# Altium PCB PCB1.PcbDoc
Units mm, origin at the board's own origin, x right, y up, seen from the top; angles counter-clockwise.
Board outline 94.16 x 39.95 mm, 2 copper layers (Top Layer, Bottom Layer); 72 components, 37 nets, 217 pads, 328 vias.
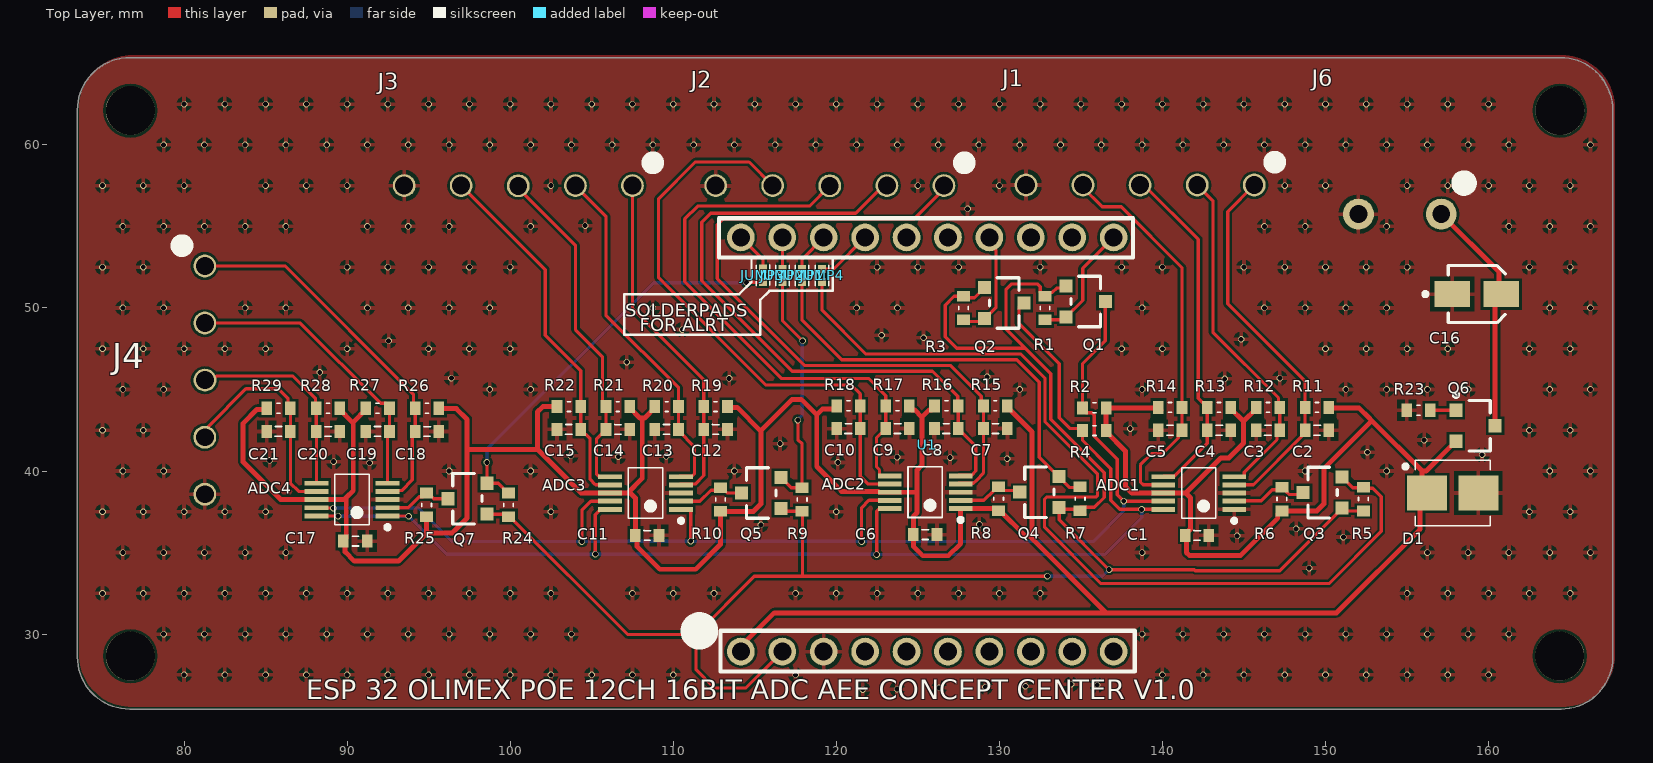
[diagram p0: Top Layer view]
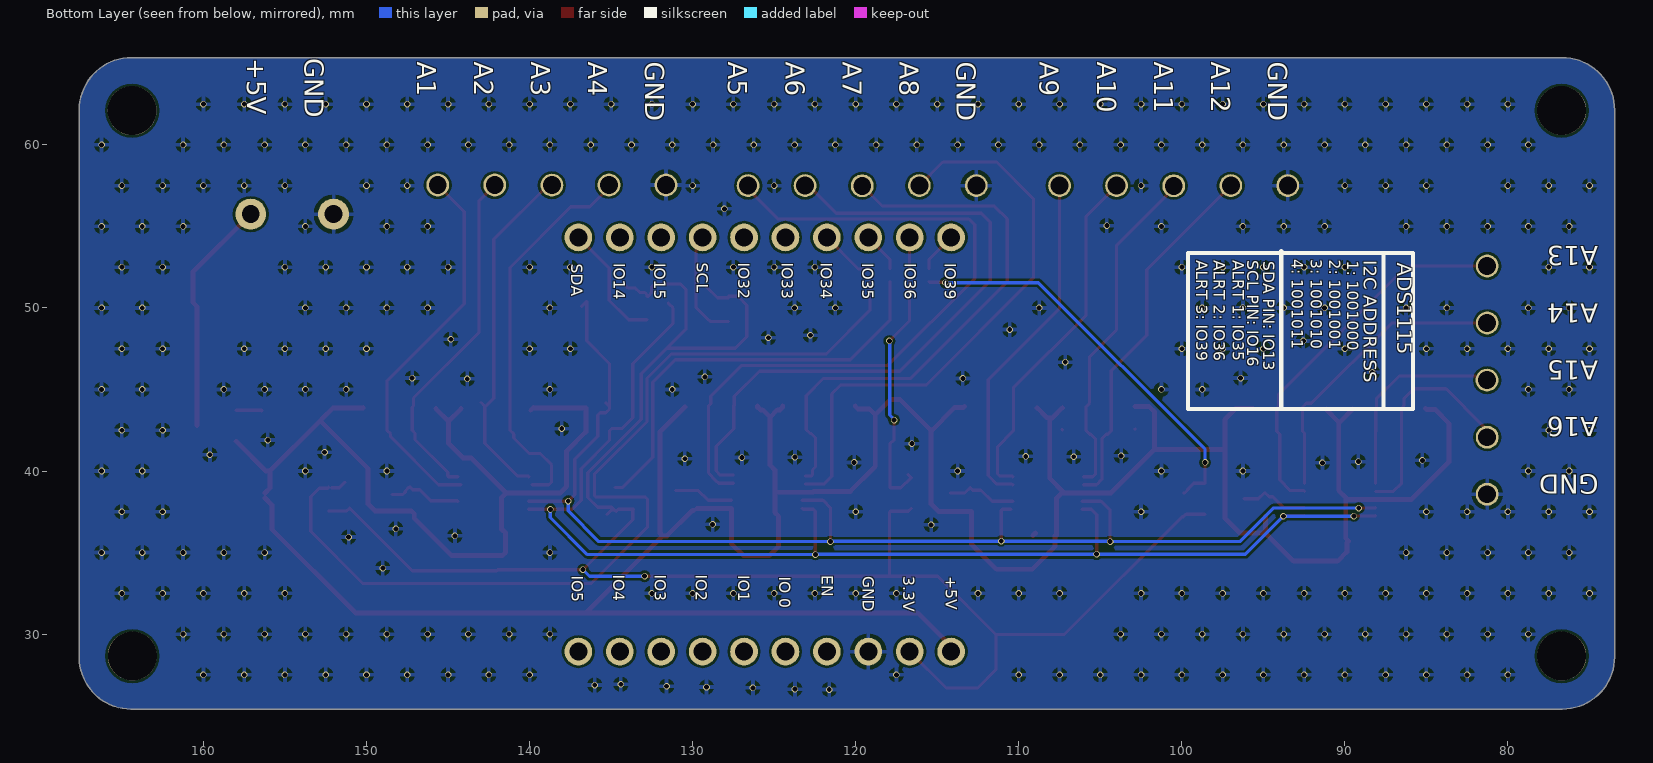
[diagram p1: Bottom Layer view, seen from below]
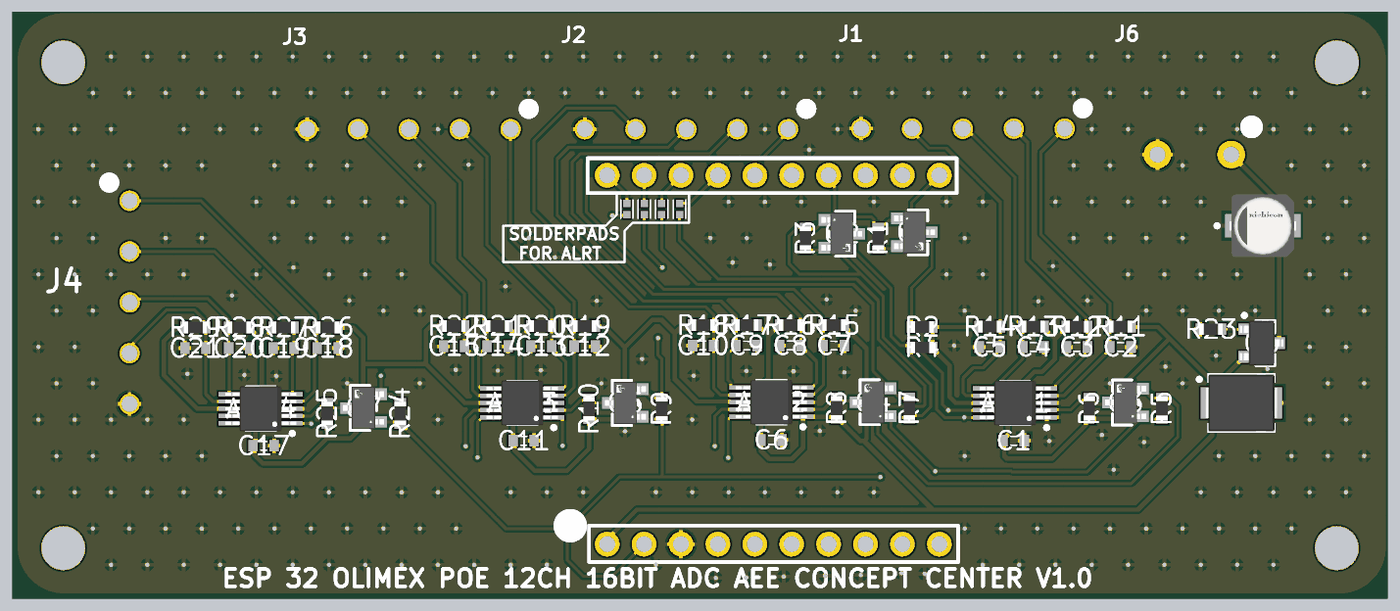
[diagram p2: 3D render of the assembled board from above, using the file's embedded part models]

## Layer stack, top to bottom
Top Solder: solder mask 0.0102, Solder Resist, Dk 3.5
Top Layer: signal copper 0.0356
Dielectric 1: dielectric 0.32, FR-4, Dk 4.8
Bottom Layer: signal copper 0.0356
Bottom Solder: solder mask 0.0102, Solder Resist, Dk 3.5

## Board outline
73.457,28.607 ccw(c76.664,28.607) 76.664,25.4 164.449,25.4 ccw(c164.449,28.565) 167.615,28.565 167.615,62.146 ccw(c164.406,62.146) 164.406,65.354 76.682,65.354 ccw(c76.682,62.129) 73.457,62.129

## Design rules (kind name [scope] priority, off if disabled: settings)
Clearance [All] p1: gap=0.15 ignorepadtopadclearanceinfootprint=FALSE
ComponentClearance [All] p1 off: gap=0.254 collisioncheckmode=3 verticalgap=0.254 showdistances=FALSE
HoleSize [All] p1: absolutevalues=TRUE maxlimit=3.54 minlimit=0.025 maxpercent=80.000 minpercent=20.000
HoleToHoleClearance [All] p1: gap=0.1 allowstackedmicrovias=TRUE
MinimumSolderMaskSliver [All] p1: minsoldermaskwidth=0.01
PolygonConnect [All] p1: connectstyle=Relief reliefconductorwidth=0.254 reliefentries=4 polygonreliefangle="90 Angle" airgapwidth=0.254
RoutingVias [All] p1: holewidth=0.25 width=0.35 viastyle="Through Hole" minholewidth=0.25 minwidth=0.35 maxholewidth=0.25 maxwidth=0.35
SilkToSilkClearance [All] p1: silktosilkclearance=0
SilkToSolderMaskClearance [IsPad] p1: minsilkscreentomaskgap=0.01 clearancetoexposedcopper=TRUE
SolderMaskExpansion SolderMaskExpansion_Via [IsVia] p1: expansion=0.102 istentingtop=TRUE
SolderMaskExpansion [All] p2: expansion=0.102 istentingtop=FALSE
SupplyNets "Schematic Supply Nets_3" [InNet('+5')] p1: voltage=0.000
SupplyNets "Schematic Supply Nets_2" [InNet('+3.3V')] p2: voltage=0.000
SupplyNets "Schematic Supply Nets" [InNet('GND')] p3: voltage=0.000
Width [All] p1: maxlimit=0.35 minlimit=0.2 preferedwidth=0.2 minimp=50.000000 maximp=50.000000 favimp=50.000000
24 further rules are at their usual default settings.

## Classes and differential pairs
component class "Level Switch": Q1 Q2 Q3 Q4 Q5 Q7 R1 R2 R3 R4 R5 R6 R7 R8 R9 R10 R24 R25
component class "Main sheet": ADC1 ADC2 ADC3 ADC4 C1 C2 C3 C4 C5 C6 C7 C8 C9 C10 C11 C12 C13 C14 C15 C16 C17 C18 C19 C20 C21 D1 J1 J2 J3 J4 J5 J6 J7 JUMP1 JUMP2 JUMP3 JUMP4 Q6 R11 R12 R13 R14 R15 R16 R17 R18 R19 R20 R21 R22 R23 R26 R27 R28 R29 T1 T2 T3 T4 T5 T6 T7 T8 T9 T10 T11 T12 U1

## Components (designator, comment, footprint, x,y, rotation, side; value= is the part's Value field where it differs from the comment)
ADC1 "ADS1115" "TSSOP50P490X110-10N ADS1115" 142.225,38.65 r180 top
ADC2 "ADS1115" "TSSOP50P490X110-10N ADS1115" 125.45,38.7 r180 top
ADC3 "ADS1115" "TSSOP50P490X110-10N ADS1115" 108.3,38.65 r180 top
ADC4 "ADS1115" "TSSOP50P490X110-10N ADS1115" 90.3,38.25 r180 top
C1 "0.1uF" "Cap 0603" 142.125,36.05 r180 top
C2 "C0603" "Cap 0603" 149.475,42.5 r180 top
C3 "C0603" "Cap 0603" 146.475,42.5 r0 top
C4 "C0603" "Cap 0603" 143.475,42.5 r180 top
C5 "C0603" "Cap 0603" 140.475,42.5 r0 top
C6 "0.1uF" "Cap 0603" 125.45,36.1 r180 top
C7 "C0603" "Cap 0603" 129.75,42.6 r180 top
C8 "C0603" "Cap 0603" 126.75,42.6 r0 top
C9 "C0603" "Cap 0603" 123.75,42.6 r180 top
C10 "C0603" "Cap 0603" 120.75,42.6 r0 top
C11 "0.1uF" "Cap 0603" 108.4,36.05 r180 top
C12 "10uf" "Cap 0603" 112.6,42.55 r180 top
C13 "C0603" "Cap 0603" 109.6,42.55 r0 top
C14 "C0603" "Cap 0603" 106.6,42.55 r180 top
C15 "C0603" "Cap 0603" 103.6,42.55 r0 top
C16 "UWX1C100MCL2GB" FP-UWX1C100MCL2GB-MFG 159.275,50.85 r0 top
C17 "0.1uF" "Cap 0603" 90.5,35.7 r180 top
C18 "10uf" "Cap 0603" 94.9,42.425 r180 top
C19 "C0603" "Cap 0603" 91.875,42.425 r0 top
C20 "C0603" "Cap 0603" 88.825,42.425 r180 top
C21 "C0603" "Cap 0603" 85.8,42.425 r0 top
D1 "TVS" "DO-214AA P6SMB" 157.8,38.65 r0 top
J1 "kontakt 5p 5.08" "Kontakt 5P 3.5" 145.631,57.539 r180 top
J2 "kontakt 5p 5.08" "Kontakt 5P 3.5" 126.6,57.5 r180 top
J3 "kontakt 5p 5.08" "Kontakt 5P 3.5" 107.497,57.5 r180 top
J4 "kontakt 5p 5.08" "Kontakt 5P 3.5" 81.275,52.572 r270 top
J6 "kontakt 2p 5.08" "Kontakt 2P 5.08" 157.099,55.753 r180 top
JUMP1 "Solder jumper" jumper 117.9,52.389 r270 top
JUMP2 "Solder jumper" jumper 116.7,52.389 r270 top
JUMP3 "Solder jumper" jumper 115.5,52.4 r270 top
JUMP4 "Solder jumper" jumper 119.125,52.389 r270 top
Q1 "AO3400A" FP-SOT23-MFG 135.3,50.4 r0 top
Q2 "AO3400A" FP-SOT23-MFG 130.3,50.3 r0 top
Q3 "AO3400A" FP-SOT23-MFG 149.825,38.675 r180 top
Q4 "AO3400A" FP-SOT23-MFG 132.45,38.7 r180 top
Q5 "AO3400A" FP-SOT23-MFG 115.4,38.65 r180 top
Q6 "AO3401A" AO-SOT-23-3L_V 159.2,42.775 r0 top
Q7 "AO3400A" FP-SOT23-MFG 97.375,38.3 r180 top
R1 "10k" "Res 0603" 132.8,50 r90 top
R2 "10k" "Res 0603" 135.825,43.875 r0 top
R3 "10k" "Res 0603" 127.8,50 r90 top
R4 "10k" "Res 0603" 135.825,42.475 r0 top
R5 "10k" "Res 0603" 152.325,38.275 r270 top
R6 "10k" "Res 0603" 147.325,38.275 r270 top
R7 "10k" "Res 0603" 134.95,38.3 r270 top
R8 "10k" "Res 0603" 129.95,38.3 r270 top
R9 "10k" "Res 0603" 117.9,38.25 r270 top
R10 "10k" "Res 0603" 112.9,38.25 r270 top
R11 "9.1k ATS" "Res 0603" 149.475,43.9 r0 top
R12 "5.1k MTS" "Res 0603" 146.475,43.9 r180 top
R13 "3.3k HEX" "Res 0603" 143.475,43.9 r0 top
R14 "3.3k EVAP" "Res 0603" 140.475,43.9 r180 top
R15 "5.1k" "Res 0603" 129.75,44 r0 top
R16 "DTS_2" "Res 0603" 126.75,44 r180 top
R17 "DTS_3" "Res 0603" 123.75,44 r0 top
R18 "DTS_4" "Res 0603" 120.75,44 r180 top
R19 "DTS_5" "Res 0603" 112.6,43.95 r0 top
R20 "DTS_6" "Res 0603" 109.6,43.95 r180 top
R21 "DTS_7" "Res 0603" 106.6,43.95 r0 top
R22 "DTS_8" "Res 0603" 103.6,43.95 r180 top
R23 "100k" "Res 0603" 155.7,43.725 r0 top
R24 "10k" "Res 0603" 99.9,37.925 r270 top
R25 "10k" "Res 0603" 94.875,37.925 r270 top
R26 "DTS_5" "Res 0603" 94.9,43.85 r0 top
R27 "DTS_6" "Res 0603" 91.875,43.85 r180 top
R28 "DTS_7" "Res 0603" 88.825,43.85 r0 top
R29 "DTS_8" "Res 0603" 85.8,43.85 r180 top
U1 "ESP32 olimex PINOUT" "ESP32 OLIMEX POE" 114.148,28.925 r90 top locked

## Footprints (in the part's own frame and the unit in brackets; to place one, negate y for a bottom-side part, rotate by r counter-clockwise, add the part's x,y. Pads: shape width x height; smd on the part's side, far side on the other; paste and mask are expansions set on the pad)
AO-SOT-23-3L_V [mm] "SOT23, 3-Leads, Body 3.1x1.8mm, Pitch 0.95mm"
  rect 0.8x0.8 smd: 1(-1.2,0.95) 2(-1.2,-0.95) 3(1.2,0)
  silkscreen extent -1.32,-1.55 0.9,2.02, body extent -1.5,-1.55 1.5,1.55, height 1.25
"Cap 0603" [mm]
  rect 0.65x0.8 smd: 1(-0.725,0) 2(0.725,0)
  silkscreen extent -0.22,-0.3 0.19,0.3, body extent -0.8,-0.4 0.8,0.4, height 0.45
"DO-214AA P6SMB" [mm] "Molded Diode, 2-Leads, Body 4,31x3,62mm, IPC Medium Density"
  rect 2.45x2.15 smd: 1(-1.575,0) 2(1.575,0)
  silkscreen extent -3.02,-2 2.3,2, body extent -2.5,-1.97 2.5,1.97, height 2.65
"ESP32 OLIMEX POE" [mm]
  round 1.7 hole 1.1: 1(0,0) 2(0,-2.54) 3(0,-5.08) 4(0,-7.62) 5(0,-10.16) 6(0,-12.7) 7(0,-15.24) 8(0,-17.78) 9(0,-20.32) 10(0,-22.86) 11(25.4,-22.86) 12(25.4,-20.32) 13(25.4,-17.78) 14(25.4,-15.24) 15(25.4,-12.7) 16(25.4,-10.16) 17(25.4,-7.62) 18(25.4,-5.08) 19(25.4,-2.54) 20(25.4,0)
  silkscreen extent 0.87,2.14 1.67,2.94
FP-SOT23-MFG [mm]
  rect 0.8x0.8 smd paste+0 mask+0: 1(-1.2,0.95) 2(-1.2,-0.95) 3(1.2,0)
  silkscreen extent -0.9,-1.55 0.9,1.55, body extent -1.7,-1.78 1.7,1.78, height 0.25
FP-UWX1C100MCL2GB-MFG [mm]
  rect 2.2x1.6 smd paste+0 mask+0: 1(-1.5,0) 2(1.5,0)
  silkscreen extent -3.27,-1.75 1.75,1.75, body extent -2.85,-2 2.85,2, height 0.25
jumper [mm]
  rect 0.5x0.5 smd: 1(0,0) 2(0.789,0)
  silkscreen extent -0.23,-0.42 1.03,0.42
"Kontakt 2P 5.08" [mm]
  round 1.9 hole 1.1: 1(0,0) 2(5.08,0)
  silkscreen extent -1.68,-2.19 -1.11,-1.62, body extent -3.43,-9.65 8.51,2.03, height 8.5
"Kontakt 5P 3.5" [mm]
  round 1.4 hole 1.1: 1(0,0) 2(3.497,0) 3(7.001,0.009) 4(10.501,-0.002) 5(13.996,-0.002)
  silkscreen extent -1.45,-1.6 -1.06,-1.21, body extent -2.3,-7.71 16.29,1.39, height 7
"Res 0603" [mm]
  rect 0.65x0.8 smd: 1(-0.725,0) 2(0.725,0)
  silkscreen extent -0.1,-0.3 0.1,0.3, body extent -0.8,-0.4 0.8,0.4, height 0.45
"TSSOP50P490X110-10N ADS1115" [mm] "TSSOP, 10-Leads, Body 3,00x3,00mm, Pitch 0,50mm, IPC Medium Density"
  rect 1.45x0.3 smd: 1(-2.175,1) 2(-2.175,0.5) 3(-2.175,0) 4(-2.175,-0.5) 5(-2.175,-1) 6(2.175,-1) 7(2.175,-0.5) 8(2.175,0) 9(2.175,0.5) 10(2.175,1)
  silkscreen extent -2.3,-1.55 1.05,1.82, body extent -2.45,-1.55 2.45,1.55, height 1.1

## Part data
ADC1 ADC2 ADC3 ADC4: library part ADS1113, "4-Channel Single ADC Delta-Sigma 860sps 16-bit Serial 10-Pin VSSOP T/R", Case/Package=VSSOP, Manufacturer="Texas Instruments", Manufacturer Part Number=ADS1115IDGSR, Max Operating Temperature=125°C, Max Supply Voltage=5.5V, Min Operating Temperature=-40°C, Min Supply Voltage=2V, Nominal Supply Current=150uA, Package Quantity=2500, Power Dissipation=900uW, Supplier Part Number=595-ADS1115IDGSR, Category="Analog to Digital Converters (ADCs)", ComponentLink1Description=https://datasheet.ciiva.com/4031/47725463s8438921n7713-4031028.pdf?src-supplier=Arrow+Electronics, ComponentLink1URL=https://datasheet.ciiva.com/4031/47725463s8438921n7713-4031028.pdf?src-supplier=Arrow+Electronics, Contact Plating=Gold, Conversion Rate=0.86KS/s, Height=1.07mm, Integral Nonlinearity (INL)=1LSB, Interface=I2C, Lead Free="Lead Free", Length=3mm, Max Supply Voltage (DC)=5.5V, Min Supply Voltage (DC)=2V, Number of A/D Converters=1, Number of Bits=16, Number of Channels=2, Number of Converters=1, Number of Inputs=4, Packaging="Tape and Reel", Pins=10, Polarity=Bipolar, Pricing="1=5,34, 10=3,91, 50=3,91, 100=3,3, 1000=2,64, 10000=2,49 (USD)", Reach SVHC Compliant=No, Resolution=16b, RoHS=Yes, RoHS Compliant=Yes, Sampling Rate=860S/s, Series=-, Stock=9640, Supplier=Mouser, Supply Type=Single, Thickness=1.02mm, Width=3mm
C1 C6 C11 C17: library part C0603, "C14663"
C2 C3 C4 C5 C7 C8 C9 C10 C13 C14 C15 C19 C20 C21: "C96446"
C12 C18: library part C0603, "C96446"
C16: library part CMP-00267-00203106-1, "UWX1C100MCL2GB WX Series 10 uF 16 V 85°C Ø3 x 5.4 mm SMT Chip Aluminum Electrolytic Cap", Capacitance=10µF, Case/Package=SMD/SMT, Dielectric Material=Aluminium, Leakage Current=3µA, Max Operating Temperature=85°C, Min Operating Temperature=-40°C, Ripple Current=18mA, Tolerance=20%, Voltage=16V, Diameter=3mm, Dissipation Factor=19%, Features="General Purpose", Height=5.4mm, Height - Seated (Max)=2.9972mm, Lead Diameter=800µm, Lead Free="Lead Free", Lead Pitch=800µm, Length=5.4mm, Life (Hours)=2000hours, Mount="Surface Mount", NexarPartId=203106, Number of Pins=2, Packaging="Cut Tape", Radiation Hardening=No, REACH SVHC="No SVHC", Ripple Current (AC)=18mA, RoHS=Compliant, Schedule B="8532220020, 8532220020", Termination=SMD/SMT, Voltage Rating=16V, Voltage Rating (AC)=16V, Voltage Rating (DC)=16V, Width=3.3mm
D1: "jlc: C78395", Manufacturer=Brightking, Manufacturer Part Number=P6SMB6.8CA/TR13
Q1 Q2 Q3 Q4 Q5 Q7: library part CMP-83955-000006-1, "MOSFET N-CH 30V 5.7A SOT23", Case/Package=SOT-23, Continuous Drain Current (ID)=5.7A, Drain to Source Voltage (Vdss)=30V, Gate to Source Voltage (Vgs)=12V, Input Capacitance=630pF, Max Operating Temperature=150°C, Max Power Dissipation=1.4W, Min Operating Temperature=-55°C, Lead Free="Lead Free", Mount="Surface Mount", Number of Elements=1, Number of Pins=3, Packaging="Tape and Reel", Power Dissipation=1.4W, Radiation Hardening=No, Rds On Max=26.5mR
Q6: library part CMP-2000-05778-1, "P-Channel MOSFET, 30 V, 4 A, -55 to 150 degC, 3-Pin SOT-23-3L, RoHS, Tape and Reel", Continuous Drain Current=4A, Drain-Source On-Volt=30V, Frequency (Max)=NotRequiredMHz, Gate-Source Voltage (Max)=?12V, Manufacturer="Alpha and Omega", Operating Temp Range=-55Cto150C, Operating Temperature Classification=Military, Output Power (Max)=NotRequiredW, Package Description="3-Pin Small Outline Transistor, Body 2.95 x 1.6 mm, Pitch 0.95 mm", Package Reference=SOT-23-3L, Package Type=SOT-23, Power Dissipation=1.4W, Power Gain=NotRequireddB, Channel Mode=Enhancement, Datasheet URL=http://www.aosmd.com/res/data_sheets/AO3401A.pdf, Datasheet Version="Rev. 3, 03/2011", Drain Current (Max)=4A, Drain Efficiency=NotRequired%, Drain-Source On-Res=0.044ohm, Manufacturer URL=http://www.aosmd.com/, Mounting=SurfaceMount, Mounting Technology=SurfaceMount, Noise Figure=NotRequireddB, Number of  Elements=1, Package URL=http://www.aosmd.com/res/packaging_information/SOT-23-3L.pdf, Pin Count=3, Polarity=P, Rad Hardened=No, Type=PowerMOSFET
R1 R2 R3 R4 R5 R6 R7 R8 R9 R10 R24 R25: library part R0603, "C25804"
R11: library part R0603, "ATS / Thermistor: 270-333k / R11: 9.1k"
R12: library part R0603, "MTS / Thermistor: 103k / R12: 5.1k"
R13: library part R0603, "HEX / Thermistor: 96k / R13: 3.3k"
R14: library part R0603, "EVAP / Thermistor: 96k / R14: 3.3k"
R15: library part R0603, "DTS_1 / Thermistor: 101k / R15: 5.1k"
R16: library part R0603, "DTS_2 / Thermistor: 101k / R16: 5.1k"
R17: library part R0603, "DTS_3 / Thermistor: 101k / R17: 5.1k"
R18: library part R0603, "DTS_4 / Thermistor: 101k / R18: 5.1k"
R19 R26: library part R0603, "DTS_5 / Thermistor: 101k / R19: 5.1k"
R20 R27: library part R0603, "DTS_6 / Thermistor: 101k / R20: 5.1k"
R21 R28: library part R0603, "DTS_7 / Thermistor: 101k / R21: 5.1k"
R22 R29: library part R0603, "DTS_8 / Thermistor: 101k / R22: 5.1k"
R23: library part R0603

## Free pads (board coordinates)
  round 3 hole 3: 6(76.708,28.651) 6(76.708,62.103) 6(164.363,28.651) 6(164.375,62.1)

## Via types
v1: diameter 0.4, hole 0.3, Top Layer to Bottom Layer, tented both sides, 328 vias

## Nets (pads, with @x,y where several pads share a name; then routed paths per layer and width w, separated by ;. In a path a pad name is that pad's centre, name@x,y a point inside that pad or via, vN(x,y) a via of type N, cw(c..) or ccw(c..) an arc to the next point about the centre after c; other vN are vias at no path point)
+3.3V: Q1.1 Q2.1 Q3.1 Q4.1 Q5.1 Q7.1 R1.2 R3.2 R5.2 R7.2 R9.2 R24.2 U1.2 | length 112.8
  Top Layer w0.2: Q7.1 99.75,37.35 R24.2 99.975,37.2 107.2,29.975 111.4,29.975 ; Q5.1 116.775,37.525 R9.2 ; U1.2 114.463,26.7 112.5,26.7 111.4,27.8 111.4,29.975 ; R9.2@117.925,37.493 117.925,33.55 ; R3.2@127.8,50.625 128.475,50.625 Q2.1 ; R3.2 127.792,50.717 127.217,50.717 126.675,50.175 126.675,48.225 127.375,47.525 131.6,47.525 ; R1.2 R1.2@132.725,50.725 ; v1@132.954,33.55 v1(132.95,33.55) 117.925,33.55 ; Q1.1 133.967,51.217 133.517,51.217 133.25,50.95 132.95,50.95 R1.2@132.725,50.725 ; R7.2@134.688,37.537 134.575,37.65 133.65,37.65 133.675,37.625 133.675,37 v1(136.725,33.95) 141.948,33.95 142.008,33.891 147.191,33.891 Q3.1 151.2,37.55 R5.2 ; R7.2@134.825,37.575 134.75,37.575 134.95,37.775 135.825,37.775 136.425,38.375 136.425,39.9 133.15,43.175 133.15,45.975 131.6,47.525 ; R7.2 135.025,37.575 R7.2@135.25,37.35 ; 111.4,29.975 114.975,33.55 117.925,33.55 ; 131.6,47.525 130.4,48.725 130.4,51.125 130.75,51.475 132.325,51.475 132.5,51.3 132.5,50.95 R1.2@132.725,50.725
  Bottom Layer w0.2: v1(132.95,33.55) 136.325,33.55 v1(136.725,33.95)
+5: ADC1.8 ADC2.1 ADC2.8 ADC3.8 ADC4.8 C1.2 C6.2 C11.2 C17.2 D1.1 Q6.2 R2.2 R4.2 R6.2 R8.2 R10.2 R11.2 R12.2 R13.2 R14.2 R15.2 R16.2 R17.2 R18.2 R19.2 R20.2 R21.2 R22.2 R25.2 R26.2 R27.2 R28.2 R29.2 U1.1 | length 236.1
  Top Layer w0.2: R28.2@89.55,43.775 R28.2 ; 90.325,43 90.375,43 ; R27.2@91.15,43.775 R27.2 ; R21.2@107.325,43.875 R21.2 ; R20.2@108.875,43.875 R20.2 ; R15.2@130.475,43.925 R15.2 ; R14.2@139.725,43.875 R14.2 ; R13.2@144.2,43.825 R13.2 ; R12.2@145.75,43.825 R12.2
  Top Layer w0.3: R29.2 85.001,43.776 84.476,43.776 83.625,42.925 83.625,40.55 85.925,38.25 ADC4.8 89.825,38.25 89.95,38.375 ; R28.2@89.55,43.775 90.325,43 ; R27.2@91.15,43.775 90.375,43 90.375,38.8 89.95,38.375 ; R25.2 94.875,36.2 ; R26.2 95.65,43.825 96.7,43.825 97.35,43.175 97.35,41.275 ; R22.2 102,43.95 101.675,43.625 101.675,41.325 ; R21.2@107.325,43.875 107.95,43.25 108.1,43.25 ; C11.2 107.675,38.347 107.372,38.65 107.2,38.65 ; C11.2@107.7,36.129 107.768,36.061 107.768,35.382 109.175,33.975 111.375,33.975 112.9,35.5 R10.2 114.925,37.525 115.375,37.975 115.375,42.45 ; R20.2@108.875,43.875 108.25,43.25 108.1,43.25 ; R19.2 113.374,43.901 113.924,43.901 115.375,42.45 ; U1.1 114.148,29.248 116.2,31.3 136.525,31.3 ; R18.2 120.025,43.969 119.85,43.794 119.144,43.794 118.8,43.45 ; R17.2 124.475,43.925 124.65,43.75 124.8,43.75 125.25,43.3 ; R16.2 126.025,43.925 125.85,43.75 125.7,43.75 125.25,43.3 ; ADC2.1@128.049,37.7 ADC2.1 ; R8.2@129.75,37.7 ADC2.1 ; R8.2 130.025,37.575 131.576,36.024 131.824,36.024 ; R15.2@130.475,43.925 132,42.4 132,36.2 131.824,36.024 ; R14.2@139.725,43.875 R2.2 R4.2 136.55,42.4 137.725,41.225 137.725,39.05 138.125,38.65 ADC1.8 141.425,38.65 ; R14.2 R14.2@139.925,43.725 ; R13.2@144.2,43.825 144.975,43.05 ; R12.2@145.75,43.825 144.975,43.05 ; R11.2 150.225,43.875 152.05,43.875 152.675,43.25 152.837,43.087 ; D1.1@156.225,38.342 155.801,37.918 155.801,36.426 150.675,31.3 136.525,31.3 ; D1.1 155.926,38.949 155.926,39.999 ; Q6.2 156.174,39.999 155.926,39.999 ; 89.95,38.375 89.95,35.875 C17.2 89.881,35.594 89.881,35.044 90.45,34.475 93.15,34.475 94.875,36.2 ; 94.875,36.2 96.45,36.2 97.35,37.1 97.35,41.275 ; 97.35,41.275 97.4,41.325 101.675,41.325 ; 101.675,41.325 104.35,38.65 104.675,38.65 ADC3.8 107.2,38.65 ; 107.2,38.65 108.1,39.55 108.1,43.25 ; 115.375,42.45 115.375,42.475 117.275,44.375 117.875,44.375 118.8,43.45 ; 118.8,43.45 118.8,40.275 120.325,38.75 122.562,38.75 122.612,38.7 ADC2.8 123.938,38.7 124.95,38.7 ; 124.95,38.7 124.95,40.05 125.25,40.35 125.25,43.3 ; 124.95,38.7 124.95,37.45 124.725,37.225 C6.2 124.725,35.375 125.3,34.8 126.875,34.8 127.625,35.55 ADC2.1 ; 131.824,36.024 136.525,31.324 136.525,31.3 ; 141.425,38.65 141.721,38.354 141.721,36.446 141.473,36.198 141.473,35.001 141.649,34.825 144.8,34.825 147.075,37.1 147.075,37.375 147.25,37.55 R6.2 149.475,37.55 149.9,37.975 149.9,40.15 152.837,43.087 ; 141.425,38.65 143.575,40.8 144.075,40.8 144.975,41.7 144.975,43.05 ; 152.837,43.087 155.926,39.999
ALRT1_IN: JUMP4.2 Q3.2 R5.1 | length 58.6
  Top Layer w0.2: JUMP4.2 119.125,49.85 121.8,47.175 131.325,47.175 132.8,45.7 132.8,43.025 136.025,39.8 136.025,38.517 135.908,38.4 132.892,38.4 132.775,38.283 132.775,36.55 136.225,33.1 150.233,33.1 153.425,36.292 153.425,38.425 152.908,38.942 152.383,38.942 R5.1 ; Q3.2@151.316,39.325 151.325,39.325 151.325,39.316 151.666,38.975 R5.1@152.125,38.975
ALRT1_OUT: ADC1.2 Q3.3 R6.1 | length 4.6
  Top Layer w0.2: ADC1.2 144.425,38.175 146.065,38.175 146.742,38.853 147.178,38.853 R6.1 147.4,39 147.625,38.775 147.625,38.7 147.767,38.558 Q3.3@148.442,38.558
ALRT2_IN: JUMP1.2 Q4.2 R7.1 | length 26.2
  Top Layer w0.2: JUMP1.2 117.9,49.25 120.325,46.825 131.075,46.825 132.45,45.45 132.45,40.85 Q4.2 134.315,38.985 R7.1@134.765,38.985
ALRT2_OUT: ADC2.2 Q4.3 R8.1 | length 3.7
  Top Layer w0.2: ADC2.2 129.05,38.2 129.65,38.8 Q4.3@131.05,38.8
ALRT3_IN: JUMP2.2 Q5.2 R9.1 | length 15.2
  Top Layer w0.2: JUMP2.2 116.7,49.21 v1(117.936,47.974) ; Q5.2@116.775,39.775 Q5.2 117.225,38.975 R9.1 117.9,41.665 117.645,41.92 v1(117.645,43.122)
  Bottom Layer w0.2: v1(117.645,43.122) 117.645,43.162 117.918,43.435 117.918,47.956 v1(117.936,47.974)
ALRT3_OUT: ADC3.2 Q5.3 R10.1 | length 4.3
  Top Layer w0.2: ADC3.2@110.375,38.15 111.64,38.15 112.317,38.828 112.828,38.828 112.975,38.975 113.3,38.65 Q5.3
ALRT4_IN: JUMP3.2 Q7.2 R24.1 | length 24.9
  Top Layer w0.2: v1@98.6,40.55 v1(98.575,40.525) Q7.2 99.275,39.25 99.6,38.925 99.6,38.875 99.825,38.65 R24.1 ; v1(114.5,51.55) 114.529,51.579 115.468,51.579 JUMP3.2
  Bottom Layer w0.2: v1(98.575,40.525) 98.575,41.325 108.8,51.55 v1(114.5,51.55)
ALRT4_OUT: ADC4.2 Q7.3 R25.1 | length 4.2
  Top Layer w0.2: ADC4.2 93.75,37.75 94.425,38.425 94.65,38.425 R25.1 94.95,38.65 95.3,38.3 Q7.3
GND: ADC1.1 ADC1.3 ADC2.3 ADC3.3 ADC4.3 C1.1 C2.1 C3.1 C4.1 C5.1 C6.1 C7.1 C8.1 C9.1 C10.1 C11.1 C12.1 C13.1 C14.1 C15.1 C16.1 C17.1 C18.1 C19.1 C20.1 C21.1 D1.2 J1.5 J2.5 J3.5 J4.5 J6.2 R23.1 U1.3 | length 0.3
  Top Layer w0.2: C15.1@102.854,42.571 C15.1 ; C14.1 C14.1@107.339,42.536 ; U1.3@119.214,28.939 U1.3 ; J6.2 J6.2@152.034,55.768
  Top Layer w0.3: C11.1@108.975,36.2 C11.1
  other v1: 121.625,26.6 123.725,26.625 126.3,26.7 129.15,26.75 131.6,26.8 136,26.875 134.4,26.925 80,27.5 82.5,27.5 85,27.5 87.5,27.5 90,27.5 92.5,27.5 95,27.5 97.5,27.5 100,27.5 102.5,27.5 105,27.5 107.5,27.5 110,27.5 117.5,27.5 140,27.5 142.5,27.5 145,27.5 147.5,27.5 150,27.5 152.5,27.5 155,27.5 157.5,27.5 160,27.5 78.75,30 81.25,30 83.75,30 86.25,30 88.75,30 91.25,30 93.75,30 96.25,30 98.75,30 101.25,30 103.75,30 138.75,30 141.25,30 143.75,30 146.25,30 148.75,30 151.25,30 153.75,30 156.25,30 158.75,30 161.25,30 75,32.5 77.5,32.5 80,32.5 82.5,32.5 85,32.5 87.5,32.5 90,32.5 92.5,32.5 95,32.5 97.5,32.5 100,32.5 102.5,32.5 107.5,32.5 110,32.5 112.5,32.5 117.5,32.5 120,32.5 122.5,32.5 125,32.5 127.5,32.5 130,32.5 132.5,32.5 155,32.5 157.5,32.5 160,32.5 162.5,32.5 165,32.5 149,34.05 76.25,35 78.75,35 81.25,35 83.75,35 86.25,35 138.75,35 156.25,35 158.75,35 161.25,35 163.75,35 166.25,35 151.1,35.95 144.575,36.025 148.2,36.45 115.375,36.7 128.775,36.725 75,37.5 77.5,37.5 80,37.5 82.5,37.5 85,37.5 102.5,37.5 120,37.5 162.5,37.5 165,37.5 76.25,40 78.75,40 96.25,40 101.25,40 113.75,40 148.75,40 153.75,40 163.75,40 166.25,40 91.375,40.5 120.1,40.525 89.175,40.575 85.25,40.65 130.475,40.75 126.975,40.825 123.725,40.85 106.625,40.875 109.575,40.9 103.725,40.925 159.6,41 152.575,41.15 116.55,41.675 156.05,41.9 75,42.5 77.5,42.5 162.5,42.5 165,42.5 138.025,42.6 76.25,45 78.75,45 98.75,45 101.25,45 131.25,45 138.75,45 151.25,45 153.75,45 156.25,45 158.75,45 163.75,45 166.25,45 143.825,45.65 113.425,45.675 96.4,45.7 147.202,45.702 129.25,45.775 88.325,46.05 107.15,46.675 75,47.5 77.5,47.5 80,47.5 82.5,47.5 85,47.5 90,47.5 95,47.5 97.5,47.5 100,47.5 137.5,47.5 140,47.5 150,47.5 152.5,47.5 155,47.5 157.5,47.5 162.5,47.5 165,47.5 92.55,47.975 144.827,48.077 125.35,48.175 122.775,48.325 110.55,48.675 76.25,50 78.75,50 83.75,50 86.25,50 91.25,50 93.75,50 96.25,50 98.75,50 108.75,50 121.25,50 123.75,50 138.75,50 146.25,50 148.75,50 151.25,50 153.75,50 163.75,50 166.25,50 75,52.5 77.5,52.5 90,52.5 92.5,52.5 95,52.5 97.5,52.5 100,52.5 122.5,52.5 125,52.5 127.5,52.5 132.5,52.5 137.5,52.5 140,52.5 145,52.5 147.5,52.5 150,52.5 152.5,52.5 155,52.5 162.5,52.5 165,52.5 76.25,55 78.75,55 81.25,55 83.75,55 86.25,55 91.25,55 93.75,55 96.25,55 101.25,55 146.25,55 148.75,55 153.75,55 161.25,55 163.75,55 166.25,55 104.6,55.05 128.05,56.075 75,57.5 77.5,57.5 80,57.5 85,57.5 87.5,57.5 90,57.5 102.5,57.5 125,57.5 130,57.5 147.5,57.5 150,57.5 155,57.5 157.5,57.5 160,57.5 162.5,57.5 165,57.5 78.75,60 81.25,60 83.75,60 86.25,60 88.75,60 91.25,60 93.75,60 96.25,60 98.75,60 101.25,60 103.75,60 106.25,60 108.75,60 111.25,60 113.75,60 116.25,60 118.75,60 121.25,60 123.75,60 126.25,60 128.75,60 131.25,60 133.75,60 136.25,60 138.75,60 141.25,60 143.75,60 146.25,60 148.75,60 151.25,60 153.75,60 156.25,60 158.75,60 161.25,60 166.25,60 80,62.5 82.5,62.5 85,62.5 87.5,62.5 90,62.5 92.5,62.5 95,62.5 97.5,62.5 100,62.5 102.5,62.5 105,62.5 107.5,62.5 110,62.5 112.5,62.5 115,62.5 117.5,62.5 120,62.5 122.5,62.5 125,62.5 127.5,62.5 130,62.5 132.5,62.5 135,62.5 137.5,62.5 140,62.5 142.5,62.5 145,62.5 147.5,62.5 150,62.5 152.5,62.5 155,62.5 157.5,62.5 160,62.5
NetADC1_4: ADC1.4 C2.2 J1.1 R11.1 | length 23.7
  Top Layer w0.2: ADC1.4@144.2,39.15 145.585,39.15 148.525,42.09 148.525,42.275 C2.2 R11.1 148.75,45.5 144,50.25 144,55.908 J1.1
NetADC1_5: ADC1.5 C3.2 J1.2 R12.1 | length 21.5
  Top Layer w0.2: J1.2 143.1,56.573 143.1,48.5 147.117,44.483 147.117,43.983 R12.1 C3.2 147.025,42.325 147.025,41.925 145.025,39.925 145.025,39.7 144.975,39.65 ADC1.5
NetADC1_6: ADC1.6 C4.2 J1.3 R13.1 | length 21.6
  Top Layer w0.2: J1.3 138.87,57.53 142.2,54.2 142.2,44.45 R13.1 ; ADC1.6 140.1,39.7 140.75,39.7 142.75,41.7 C4.2 R13.1 ; R13.1@142.975,44.2 142.75,43.975 R13.1
NetADC1_7: ADC1.7 C5.2 J1.4 R14.1 | length 24.1
  Top Layer w0.2: J1.4@135.053,57.447 136.3,56.2 137.475,56.2 141.2,52.475 R14.1 C5.2 140.975,42.275 140.975,42.025 140.025,41.075 139.35,41.075 138.65,40.375 138.65,39.325 138.825,39.15 ADC1.7@139.85,39.15
NetADC2_4: ADC2.4 C7.2 J2.1 R15.1 | length 44
  Top Layer w0.2: J2.1@126.701,57.401 124.75,55.45 113.05,55.45 112.7,55.1 112.7,51.8 118.025,46.475 127,46.475 128.892,44.583 128.892,44.133 R15.1 C7.2 129.025,39.871 128.6,39.446 128.404,39.25 ADC2.4@127.491,39.25
NetADC2_5: ADC2.5 C8.2 J2.2 R16.1 | length 40.5
  Top Layer w0.2: J2.2@122.878,57.494 121.185,55.8 112.3,55.8 111.75,55.25 111.75,51.675 117.3,46.125 125.9,46.125 127.442,44.583 127.442,44.033 R16.1 C8.2 128.55,41.525 128.55,40 128.3,39.75 ADC2.5@127.491,39.75
NetADC2_6: ADC2.6 C9.2 J2.3 R17.1 | length 34.5
  Top Layer w0.2: J2.3 118.358,56.25 111.5,56.25 110.707,55.457 110.707,51.593 116.625,45.675 121.975,45.675 123.025,44.625 R17.1 C9.2 123.025,42.525 122.8,42.3 122.725,42.3 122.466,42.041 122.466,40.25 122.65,40.066 122.65,39.75 122.7,39.7 ADC2.6@123.091,39.7
NetADC2_7: ADC2.7 C10.2 J2.4 R18.1 | length 35.6
  Top Layer w0.2: J2.4 114.651,58.95 111.35,58.95 109.1,56.7 109.1,51.85 115.675,45.275 120.925,45.275 121.475,44.725 R18.1 C10.2 121.475,39.675 121.95,39.2 ADC2.7@123.091,39.2
NetADC3_4: ADC3.4 C12.2 J3.1 R19.1 | length 21.3
  Top Layer w0.2: J3.1 107.497,49.978 111.875,45.6 R19.1 C12.2 111.875,39.725 111.35,39.2 110.425,39.2 ADC3.4@110.375,39.15
NetADC3_5: ADC3.5 C13.2 J3.2 R20.1 | length 21.7
  Top Layer w0.2: J3.2 105.875,55.625 105.875,49.55 110.325,45.1 R20.1 C13.2 110.325,42.475 111.3,41.5 111.3,39.817 111.183,39.7 110.425,39.7 ADC3.5@110.375,39.65
NetADC3_6: ADC3.6 C14.2 J3.3 R21.1 | length 21.7
  Top Layer w0.2: J3.3@100.104,57.883 100.104,57.604 99.991,57.491 J3.3@100.21,57.272 ; J3.3 100.496,57.35 104,53.846 104,48.675 105.658,47.017 105.658,44.167 R21.1 C14.2 105.875,42.475 105.65,42.25 105.575,42.25 105.3,41.975 105.3,39.8 105.45,39.65 ADC3.6@106.025,39.65
NetADC3_7: ADC3.7 C15.2 J3.4 R22.1 | length 22.6
  Top Layer w0.2: J3.4 102.15,52.348 102.15,48.325 104.325,46.15 R22.1 C15.2 104.325,42.475 104.55,42.25 104.625,42.25 104.9,41.975 104.9,39.496 105.196,39.2 105.2,39.2 105.238,39.162 106.013,39.162 ADC3.7@106.025,39.15
NetADC4_4: ADC4.4 C18.2 J4.1 R26.1 | length 23.2
  Top Layer w0.2: J4.1 86.203,52.572 94.067,44.708 94.067,43.958 R26.1 C18.2 94,42.25 94,39.45 93.35,38.8 92.525,38.8 ADC4.4
NetADC4_5: ADC4.5 C19.2 J4.2 R27.1 | length 18.2
  Top Layer w0.2: J4.2 87.125,49.075 92.05,44.15 92.375,44.15 92.6,43.925 C19.2 92.475,42.3 ADC4.5
NetADC4_6: ADC4.6 C20.2 J4.3 R28.1 | length 12.7
  Top Layer w0.2: J4.3 81.514,45.801 81.977,45.801 82.001,45.825 86.675,45.825 88.067,44.433 88.067,43.883 R28.1 C20.2 88.125,42.4 ADC4.6
NetADC4_7: ADC4.7 C21.2 J4.4 R29.1 | length 13.9
  Top Layer w0.2: J4.4 81.503,42.301 81.503,42.753 83.795,45.045 85.765,45.045 86.378,44.433 86.378,43.997 R29.1 C21.2 86.525,39.25 87.025,38.75 ADC4.7
NetC16_2: C16.2 J6.1 Q6.3 | length 14.6
  Top Layer w0.3: J6.1 160.65,52.202 160.65,50.35 160.4,50.1 Q6.3
NetJUMP1_1: JUMP1.1 U1.18 | length 2.5
  Top Layer w0.2: JUMP1.1 117.9,52.997 U1.18
NetJUMP2_1: JUMP2.1 U1.19 | length 1.9
  Top Layer w0.2: U1.19 116.694,54.319 116.694,52.395 JUMP2.1
NetJUMP3_1: JUMP3.1 U1.20 | length 2.5
  Top Layer w0.2: U1.20 115.5,52.973 JUMP3.1
NetJUMP4_1: JUMP4.1 U1.17 | length 3.4
  Top Layer w0.2: JUMP4.1 119.832,52.389 U1.17
NetQ6_1: Q6.1 R23.2 | length 1.7
  Top Layer w0.2: R23.2@156.425,43.7 156.45,43.725 Q6.1 ; R23.2 R23.2@156.475,43.675
SCL: ADC1.10 ADC2.10 ADC3.10 ADC4.1 ADC4.10 Q2.3 R4.1 | length 79.7
  Top Layer w0.2: ADC4.10 88.131,37.244 89.444,37.244 v1(89.45,37.238) ; ADC4.1 92.487,37.238 93.762,37.238 v1(93.775,37.225) ; v1(105.225,34.9) 105.225,37.325 105.55,37.65 ADC3.10 ; v1(122.475,34.875) 122.475,37.533 122.592,37.65 123.225,37.65 ADC2.10 ; Q2.3 131.2,50 131.2,49.05 133.675,46.575 133.675,43.26 134.335,42.6 134.975,42.6 R4.1 135.1,41.875 136.825,40.15 136.825,38.2 137.375,37.65 v1(138.725,37.65) ADC1.10
  Bottom Layer w0.2: v1(89.45,37.238) 89.463,37.225 v1(93.775,37.225) 96.1,34.9 v1(105.225,34.9) 105.237,34.887 122.463,34.887 v1(122.475,34.875) 136.45,34.875 138.725,37.15 v1(138.725,37.65)
"SCL 3.3V": Q2.2 R3.1 U1.14 | length 6.8
  Top Layer w0.2: R3.1@127.8,49.175 128.925,49.175 Q2.2 129.8,50.05 129.8,53.507 129.388,53.919 U1.14
SDA: ADC1.9 ADC2.9 ADC3.1 ADC3.9 ADC4.9 Q1.3 R2.1 | length 79.4
  Top Layer w0.2: ADC4.9 88.137,37.738 89.137,37.738 v1(89.15,37.725) ; v1(104.4,35.675) 104.4,37.6 104.95,38.15 ADC3.9 ; ADC3.1 111.025,37.65 111.075,37.6 v1(111.075,35.7) ; v1(121.55,35.675) 121.55,37.75 122,38.2 ADC2.9 ; R2.1@135.325,44.175 R2.1@135.1,43.95 ; Q1.3@136.8,50.1 Q1.3 136.5,47.975 135.1,46.575 R2.1@135.1,43.95 ; ADC1.9 v1(137.625,38.15) 137.225,38.55 137.225,40.721 135.825,42.121 135.825,43.425 135.675,43.575 135.325,43.575 135.1,43.8 R2.1 R2.1@135.1,43.95
  Bottom Layer w0.2: v1(89.15,37.725) 94.4,37.725 96.45,35.675 v1(104.4,35.675) 104.412,35.688 111.063,35.688 v1(111.075,35.7) 111.087,35.688 121.538,35.688 v1(121.55,35.675) 135.75,35.675 137.625,37.55 v1(137.625,38.15)
"SDA 3.3V": Q1.2 R1.1 U1.11 | length 7.5
  Top Layer w0.2: R1.1 133.925,49.275 Q1.2 135.108,50.458 135.108,52.425 U1.11
pads on no net: U1.4 U1.5 U1.6 U1.7 U1.8 U1.9 U1.10 U1.12 U1.13 U1.15 U1.16

## Polygon pours and split planes (outlines as drawn)
GND on Bottom Layer "GND_L02_P000" (solid, pour order 0): 73.457,28.607 ccw(c76.664,28.607) 76.664,25.4 164.449,25.4 ccw(c164.449,28.565) 167.615,28.565 167.615,62.146 ccw(c164.406,62.146) 164.406,65.354 76.682,65.354 ccw(c76.682,62.129) 73.457,62.129
GND on Top Layer "Top Layer" (solid, pour order 1): 73.576,28.743 ccw(c76.782,28.743) 76.782,25.537 164.568,25.537 ccw(c164.568,28.702) 167.733,28.702 167.733,62.283 ccw(c164.525,62.283) 164.525,65.491 76.8,65.491 ccw(c76.8,62.266) 73.576,62.266

## Other copper
Top Layer:

## Silkscreen, mask and mechanical layers (free items; w line width, h text height)
Top Overlay:
  lines w0.15: 107,48.35 115.35,48.35 115.35,50.5 115.9,51.05 119.775,51.05 119.775,53.1 114.8,53.1 114.8,51.6 114.05,50.85 107,50.85 107,48.35
  lines w0.254: 112.8,53.1 138.2,53.1 138.2,55.5 112.8,55.5 112.8,53.1 ; 112.9,27.7 138.3,27.7 138.3,30.2 112.9,30.2 112.9,27.7
  text "SOLDERPADS" at 107.066,49.45 h0.8
  text "FOR ALRT" at 107.945,48.57 h0.8
  text "ESP 32 OLIMEX POE 12CH 16BIT ADC AEE CONCEPT CENTER V1.0" at 87.504,26.004 h1.2
Bottom Overlay:
  lines w0.254: 93.9,43.95 93.9,53.5 ; 87.625,43.8 85.825,43.8 85.825,53.375 87.625,53.375 ; 87.625,43.8 87.625,53.375 ; 87.625,43.8 99.625,43.8 99.625,53.375 87.625,53.375
  text "GND" at 154.2,65.302 h2 r90
  text "+5V" at 157.7,65.302 h2 r90
  text "GND" at 95.1,65.1 h2 r90
  text "A12" at 98.6,65.102 h2 r90
  text "A11" at 102.1,65.102 h2 r90
  text "A10" at 105.6,65.102 h2 r90
  text "A9" at 109.1,65.102 h2 r90
  text "GND" at 114.2,65.1 h2 r90
  text "A8" at 117.7,65.102 h2 r90
  text "A7" at 121.2,65.102 h2 r90
  text "A6" at 124.7,65.1 h2 r90
  text "A5" at 128.2,65.102 h2 r90
  text "GND" at 133.3,65.1 h2 r90
  text "A4" at 136.8,65.102 h2 r90
  text "A3" at 140.3,65.102 h2 r90
  text "A2" at 143.8,65.102 h2 r90
  text "A1" at 147.3,65.102 h2 r90
  text "A13" at 74.473,54.175 h2 r180
  text "3: 1001010" at 92.325,52.975 h1.2 r90
  text "4: 1001011" at 93.5,52.975 h1.2 r90
  text "2: 1001001" at 91.2,52.95 h1.2 r90
  text "I2C ADDRESS" at 88.855,52.93 h0.8 r90
  text "SCL PIN: IO16" at 96.225,52.925 h1.2 r90
  text "ALRT 1: IO35" at 97.113,52.923 h1.2 r90
  text "ALRT 2: IO36" at 98.3,52.927 h1.2 r90
  text "ALRT 3: IO39" at 99.35,52.927 h1.2 r90
  text "1: 1001000" at 90.1,52.9 h1.2 r90
  text "SDA PIN: IO13" at 95.25,52.875 h1.2 r90
  text "ADS1115" at 87.1,52.775 h1.52 r90
  text "IO34" at 122.375,52.775 h1.2 r90
  text "IO33" at 124.775,52.775 h1.2 r90
  text "IO32" at 127.45,52.775 h1.2 r90
  text "SCL" at 130,52.775 h1.2 r90
  text "IO39" at 114.775,52.75 h1.2 r90
  text "IO36" at 117.225,52.75 h1.2 r90
  text "IO35" at 119.85,52.75 h1.2 r90
  text "IO15" at 132.6,52.75 h1.2 r90
  text "IO14" at 135.075,52.75 h1.2 r90
  text "SDA" at 137.675,52.725 h1.2 r90
  text "A14" at 74.473,50.65 h2 r180
  text "A15" at 74.473,47.175 h2 r180
  text "A16" at 74.448,43.7 h2 r180
  text "GND" at 74.425,40.175 h2 r180
  text "IO2" at 130.05,33.625 h1.2 r90
  text "IO3" at 132.575,33.625 h1.2 r90
  text "IO4" at 135.1,33.625 h1.2 r90
  text "EN" at 122.325,33.6 h1.2 r90
  text "IO1" at 127.45,33.6 h1.2 r90
  text "IO5" at 137.65,33.575 h1.2 r90
  text "+5V" at 114.725,33.55 h1.2 r90
  text "3.3V" at 117.325,33.55 h1.2 r90
  text "GND" at 119.8,33.55 h1.2 r90
  text "IO 0" at 124.925,33.525 h1.2 r90
Board Shape:
  the board outline again, w0.5